# EAGLE board Daughter_Board (EAGLE 8.3.2)
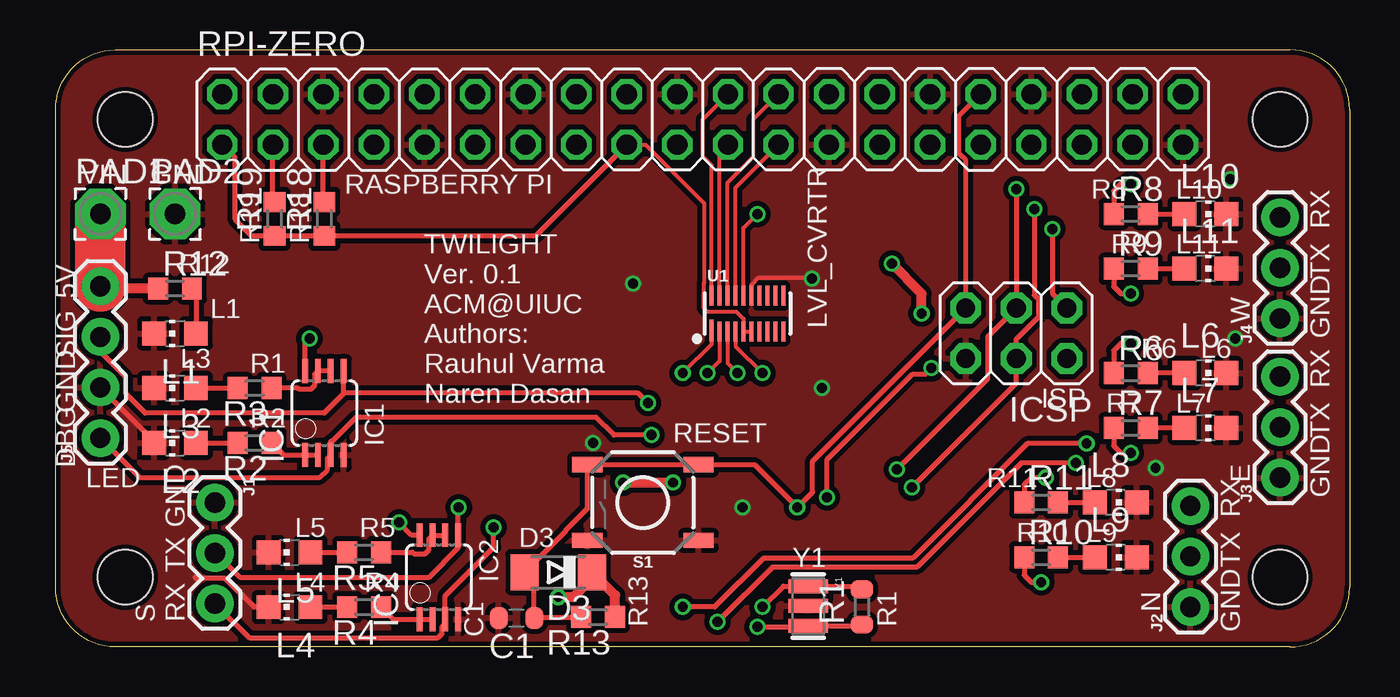
[diagram p0: board, top side]
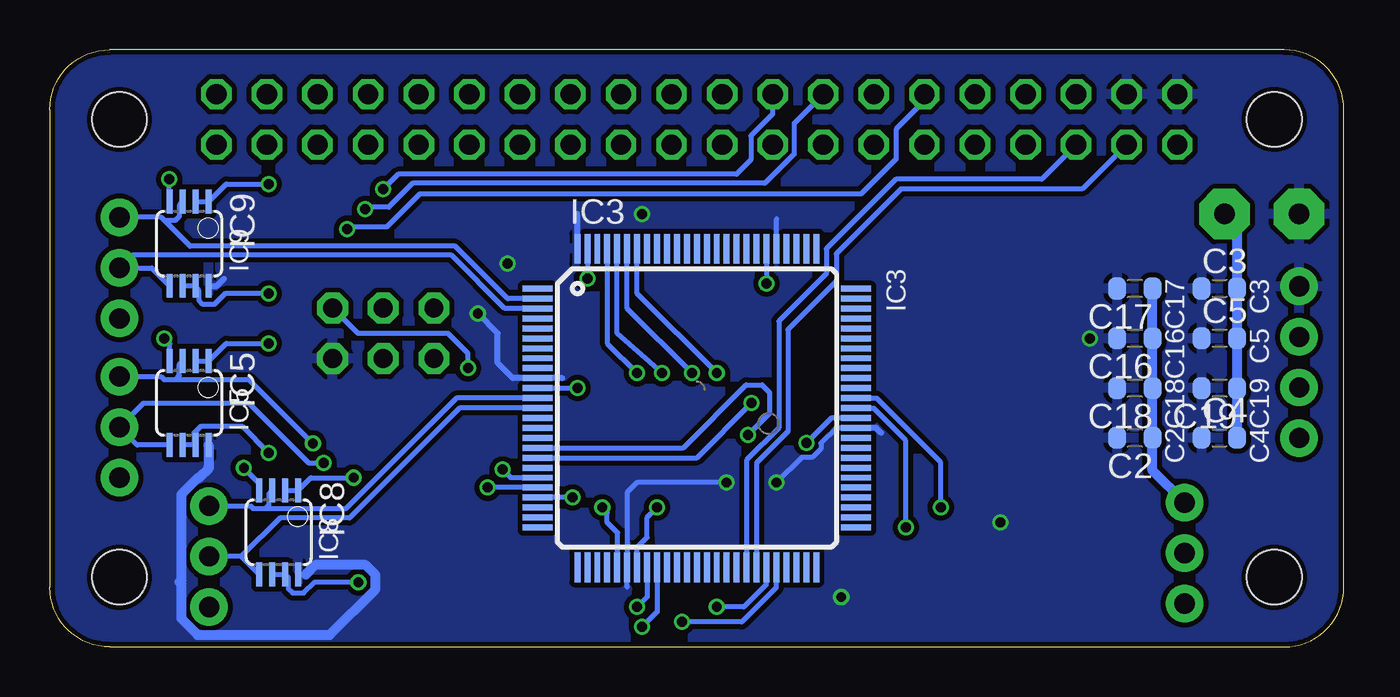
[diagram p1: board, bottom side, seen from below]

Size 65 x 30 mm. Coordinates in mm from the lower left corner, seen from the top.
Outline: 0,3 0,27 arc-90 3,30 62,30 arc-90 65,27 65,3 arc-90 62,0 3,0 arc-90 0,3
Copper layers (1*16): Top 0.035mm / dielectric 1.5mm / Bottom 0.035mm
Design rules "SeeedStudio_2layer_DRU_no_angle_20140221": minimum track width 6mil, minimum drill 12mil, track to track 6mil, track to pad 6mil, pad to pad 6mil, via to via 6mil, smd to smd 0mil, copper to edge 10mil, drill to drill 10mil, minimum pad ring 10mil, minimum via ring 6mil, stop-mask expansion 2mil, vias tented up to drill 100mil, thermal gap 10mil
Net classes: 0 default: width 0.203 mm, drill 0.406 mm, clearance 0.203 mm; 1 power: width 0.61 mm, drill 0.406 mm, clearance 0.203 mm; 2 gnd: width 0.305 mm, drill 0.406 mm, clearance 0.203 mm; 3 power usb: width 0.508 mm, drill 0.406 mm, clearance 0.203 mm
Holes 2.75 mm at 3.5,3.5 3.5,26.5 61.5,26.5 61.5,3.5
tKeepout: area 0.8,23.8 to 6.2,29.2; area 0.8,0.8 to 6.2,6.2; area 58.8,0.8 to 64.2,6.2; area 58.8,23.8 to 64.2,29.2
bKeepout: area 0.8,23.8 to 6.2,29.2; area 0.8,0.8 to 6.2,6.2; area 58.8,0.8 to 64.2,6.2; area 58.8,23.8 to 64.2,29.2

## Footprints (pad centres in the part's own frame; a part is rotated, then mirrored left to right if it is on the bottom)
C0603-ROUND = smd 0.898 x 1.1: 1 -0.889,0; 2 0.889,0
MINIMELF = smd 1.4 x 1.8: A 1.7,0; C -1.7,0
MSOP08 = smd 0.3 x 1.2: 1 -0.976,-2.113; 2 -0.326,-2.113; 3 0.324,-2.113; 4 0.974,-2.113; 5 0.974,2.112; 6 0.324,2.112; 7 -0.326,2.112; 8 -0.976,2.112
TQFP100 = smd 1.5 x 0.3: 1 -8,6; 2 -8,5.5; 3 -8,5; 4 -8,4.5; 5 -8,4; 6 -8,3.5; 7 -8,3; 8 -8,2.5; 9 -8,2; 10 -8,1.5; 11 -8,1; 12 -8,0.5; 13 -8,0; 14 -8,-0.5; 15 -8,-1; 16 -8,-1.5; 17 -8,-2; 18 -8,-2.5; 19 -8,-3; 20 -8,-3.5; 21 -8,-4; 22 -8,-4.5; 23 -8,-5; 24 -8,-5.5; 25 -8,-6; 51 8,-6; 52 8,-5.5; 53 8,-5; 54 8,-4.5; 55 8,-4; 56 8,-3.5; 57 8,-3; 58 8,-2.5; 59 8,-2; 60 8,-1.5; 61 8,-1; 62 8,-0.5; 63 8,0; 64 8,0.5; 65 8,1; 66 8,1.5; 67 8,2; 68 8,2.5; 69 8,3; 70 8,3.5; 71 8,4; 72 8,4.5; 73 8,5; 74 8,5.5; 75 8,6 | smd 0.3 x 1.5: 26 -6,-8; 27 -5.5,-8; 28 -5,-8; 29 -4.5,-8; 30 -4,-8; 31 -3.5,-8; 32 -3,-8; 33 -2.5,-8; 34 -2,-8; 35 -1.5,-8; 36 -1,-8; 37 -0.5,-8; 38 0,-8; 39 0.5,-8; 40 1,-8; 41 1.5,-8; 42 2,-8; 43 2.5,-8; 44 3,-8; 45 3.5,-8; 46 4,-8; 47 4.5,-8; 48 5,-8; 49 5.5,-8; 50 6,-8; 76 6,8; 77 5.5,8; 78 5,8; 79 4.5,8; 80 4,8; 81 3.5,8; 82 3,8; 83 2.5,8; 84 2,8; 85 1.5,8; 86 1,8; 87 0.5,8; 88 0,8; 89 -0.5,8; 90 -1,8; 91 -1.5,8; 92 -2,8; 93 -2.5,8; 94 -3,8; 95 -3.5,8; 96 -4,8; 97 -4.5,8; 98 -5,8; 99 -5.5,8; 100 -6,8
2X03 = drill 0.95 pad 1.55 octagon: 1 -2.54,-1.27; 2 -2.54,1.27; 3 0,-1.27; 4 0,1.27; 5 2.54,-1.27; 6 2.54,1.27
1X03 = drill 1.016 pad 1.88: 1 0,0; 2 2.54,0; 3 5.08,0
1X04 = drill 1.016 pad 1.88: 1 0,0; 2 2.54,0; 3 5.08,0; 4 7.62,0
CHIP-LED0805 = smd 1.2 x 1.2: A 0,-1.05; C 0,1.05
2,54/1,0 = drill 1.016 pad 2.54 octagon: 1 0,0
R0603-ROUND = smd 0.898 x 1.1: 1 -0.889,0; 2 0.889,0
R0603 = smd 1 x 1.1: 1 -0.85,0; 2 0.85,0
2X20 = drill 1.016 octagon: 1 -24.13,-1.27; 2 -24.13,1.27; 3 -21.59,-1.27; 4 -21.59,1.27; 5 -19.05,-1.27; 6 -19.05,1.27; 7 -16.51,-1.27; 8 -16.51,1.27; 9 -13.97,-1.27; 10 -13.97,1.27; 11 -11.43,-1.27; 12 -11.43,1.27; 13 -8.89,-1.27; 14 -8.89,1.27; 15 -6.35,-1.27; 16 -6.35,1.27; 17 -3.81,-1.27; 18 -3.81,1.27; 19 -1.27,-1.27; 20 -1.27,1.27; 21 1.27,-1.27; 22 1.27,1.27; 23 3.81,-1.27; 24 3.81,1.27; 25 6.35,-1.27; 26 6.35,1.27; 27 8.89,-1.27; 28 8.89,1.27; 29 11.43,-1.27; 30 11.43,1.27; 31 13.97,-1.27; 32 13.97,1.27; 33 16.51,-1.27; 34 16.51,1.27; 35 19.05,-1.27; 36 19.05,1.27; 37 21.59,-1.27; 38 21.59,1.27; 39 24.13,-1.27; 40 24.13,1.27
TACTILE_SWITCH_SMD_5.2MM = smd 1.524 x 0.762: 1 -2.794,1.905; 2 2.794,1.905; 3 -2.794,-1.905; 4 2.794,-1.905
UFDFN-20 = smd 0.2 x 1.1: 1 -1.8,-0.85 | smd 0.2 x 1: 2 -1.4,-0.9; 3 -1,-0.9; 4 -0.6,-0.9; 5 -0.2,-0.9; 6 0.2,-0.9; 7 0.6,-0.9; 8 1,-0.9; 9 1.4,-0.9; 10 1.8,-0.9; 11 1.8,0.9; 12 1.4,0.9; 13 1,0.9; 14 0.6,0.9; 15 0.2,0.9; 16 -0.2,0.9; 17 -0.6,0.9; 18 -1,0.9; 19 -1.4,0.9; 20 -1.8,0.9
RESONATOR = smd 0.7 x 2: 1 -1,0; 2 0,0; 3 1,0

## Placement (x,y rotation side)
C1  22p  [C0603-ROUND]  23.15,1.45 180 top
C2  100n  [C0603-ROUND]  10.5,10.5 180 bottom
C3  100n  [C0603-ROUND]  6.25,18 0 bottom
C4  100n  [C0603-ROUND]  6.25,10.5 0 bottom
C5  100n  [C0603-ROUND]  6.25,15.5 0 bottom
C16  100n  [C0603-ROUND]  10.5,15.5 180 bottom
C17  100n  [C0603-ROUND]  10.5,18 180 bottom
C18  100n  [C0603-ROUND]  10.5,13 180 bottom
C19  100n  [C0603-ROUND]  6.25,13 180 bottom
D3  CD1206-S01575  [MINIMELF]  25.25,3.75 180 top
IC1  LMV358MMX  [MSOP08]  13.5,11.75 0 top
IC2  LMV358MMX  [MSOP08]  19.25,3.5 0 top
IC3  ATMEGA2560-16AU  [TQFP100]  32.5,12 0 bottom
IC5  LMV358MMX  [MSOP08]  58,12.25 180 bottom
IC8  LMV358MMX  [MSOP08]  53.5,5.75 180 bottom
IC9  LMV358MMX  [MSOP08]  58,20.25 180 bottom
ICSP  3x2M  [2X03]  48.25,15.75 180 top
J1  [1X03]  8,7.25 270 top
J2  [1X03]  57,2 90 top
J3  [1X03]  61.5,8.5 90 top
J4  [1X03]  61.5,16.5 90 top
J5  [1X04]  2.25,10.49 90 top
L1  GREEN  [CHIP-LED0805]  6,15.75 90 top
L2  YELLOW  [CHIP-LED0805]  6,10.25 90 top
L3  YELLOW  [CHIP-LED0805]  6,13 90 top
L4  YELLOW  [CHIP-LED0805]  11.75,2 90 top
L5  YELLOW  [CHIP-LED0805]  11.75,4.75 90 top
L6  YELLOW  [CHIP-LED0805]  57.75,13.75 270 top
L7  YELLOW  [CHIP-LED0805]  57.75,11 270 top
L8  YELLOW  [CHIP-LED0805]  53.25,7.25 270 top
L9  YELLOW  [CHIP-LED0805]  53.25,4.5 270 top
L10  YELLOW  [CHIP-LED0805]  57.75,21.75 270 top
L11  YELLOW  [CHIP-LED0805]  57.75,19 270 top
PAD1  WIREPAD2,54/1,0  [2,54/1,0]  2.25,21.75 0 top
PAD2  WIREPAD2,54/1,0  [2,54/1,0]  6,21.75 0 top
R1  1M  [R0603-ROUND]  40.5,2 90 top
R2  1k  [R0603]  10,10.25 180 top
R3  1k  [R0603]  10,13 180 top
R4  1k  [R0603]  15.5,2 180 top
R5  1k  [R0603]  15.5,4.75 180 top
R6  1k  [R0603]  54,13.75 0 top
R7  1k  [R0603]  54,11 0 top
R8  1k  [R0603]  54,21.75 0 top
R9  1k  [R0603]  54,19 0 top
R10  1k  [R0603]  49.5,4.5 0 top
R11  1k  [R0603]  49.5,7.25 0 top
R12  1k  [R0603]  6,18 0 top
R13  10k  [R0603]  27.25,1.5 180 top
R18  10k  [R0603]  13.5,21.5 90 top
R19  10k  [R0603]  11,21.5 90 top
RPI-ZERO  [2X20]  32.5,26.5 0 top
S1  MOMENTARY-SWITCH-SPST-SMD-5.2-REDUNDANT  [TACTILE_SWITCH_SMD_5.2MM]  29.5,7.25 180 top
U1  TXB0108DQSR  [UFDFN-20]  34.75,16.75 0 top
Y1  CSTCE16M0V53-R0 16MHZ  [RESONATOR]  37.8,2.05 270 top

## Library data of the parts
C1-C5 C16-C19 IC3 ICSP R1 Y1 = SmartPrj
D3 = diode
IC1 IC2 IC5 IC8 IC9 = linear
J1-J4 = SparkFun-Connectors
J5 = SparkFun-Connectors; PROD_ID: CONN-09696
L1-L11 = led
PAD1 PAD2 = wirepad
R2-R13 R18 R19 = resistor
RPI-ZERO = pinhead
S1 = SparkFun-Switches; PROD_ID: SWCH-08247; SF_SKU: COM-08720
U1 = SparkFun-IC-Comms; PROD_ID: IC-12292

## Nets
3V3_OUT: R18.1 R19.1 RPI-ZERO.1 RPI-ZERO.17 U1.5 U1.6
+5V [power usb]: C2.2 C3.1 C4.1 C5.1 C16.2 C17.2 C18.2 C19.2 D3.C IC1.8 IC2.8 IC3.10 IC3.31 IC3.61 IC3.80 IC3.100 IC5.8 IC8.8 IC9.8 ICSP.2 J5.4 PAD1.1 R12.1 R13.1 RPI-ZERO.2 RPI-ZERO.4 U1.16
ARDU_0: IC3.97 U1.4
ARDU_1: IC3.96 U1.3
ARDU_2: IC3.95 U1.2
ARDU_3: IC3.94 U1.1
GND: C1.2 C2.1 C3.2 C4.2 C5.2 C16.1 C17.1 C18.1 C19.1 IC1.4 IC2.4 IC3.11 IC3.32 IC3.62 IC3.81 IC3.99 IC5.4 IC8.4 IC9.4 ICSP.6 J1.1 J2.1 J3.1 J4.1 J5.2 L1.C L2.C L3.C L4.C L5.C L6.C L7.C L8.C L9.C L10.C L11.C PAD2.1 RPI-ZERO.6 RPI-ZERO.9 RPI-ZERO.14 RPI-ZERO.20 RPI-ZERO.25 RPI-ZERO.30 RPI-ZERO.34 RPI-ZERO.39 S1.1 S1.2 U1.15 Y1.2
GPIO4: RPI-ZERO.7
GPIO5: RPI-ZERO.29
GPIO6: RPI-ZERO.31
GPIO7: RPI-ZERO.26
GPIO8: RPI-ZERO.24 U1.18
GPIO9: RPI-ZERO.21 U1.19
GPIO10: RPI-ZERO.19
GPIO11: RPI-ZERO.23 U1.17
GPIO13: RPI-ZERO.33
GPIO14: RPI-ZERO.8
GPIO15: RPI-ZERO.10
GPIO16: RPI-ZERO.36
GPIO17: RPI-ZERO.11
GPIO19: RPI-ZERO.35
GPIO20: RPI-ZERO.38
GPIO21: RPI-ZERO.40
GPIO22: RPI-ZERO.15
GPIO25: RPI-ZERO.22 U1.20
GPIO26: RPI-ZERO.37
GPIO27: RPI-ZERO.13
ID_SC: RPI-ZERO.28
ID_SD: RPI-ZERO.27
N$1: L3.A R3.2
N$2: L2.A R2.2
N$3: L1.A R12.2
N$4: IC1.1 IC1.2 R2.1
N$5: IC5.6 IC5.7 R7.1
N$6: IC1.6 IC1.7 R3.1
N$7: IC5.1 IC5.2 R6.1
N$8: IC2.6 IC2.7 R5.1
N$9: IC2.1 IC2.2 R4.1
N$10: L4.A R4.2
N$11: L5.A R5.2
N$12: IC8.1 IC8.2 R11.1
N$13: L7.A R7.2
N$14: L6.A R6.2
N$15: IC8.6 IC8.7 R10.1
N$16: IC9.1 IC9.2 R8.1
N$17: IC9.6 IC9.7 R9.1
N$18: L11.A R9.2
N$19: L10.A R8.2
N$21: L8.A R11.2
N$22: L9.A R10.2
PB1: IC3.20 ICSP.3 RPI-ZERO.18
PB2: IC3.21 ICSP.4 RPI-ZERO.16
PB3: IC3.22 ICSP.1 RPI-ZERO.12
PE0: IC3.2 IC9.3 J4.3
PE1: IC3.3 IC9.5 J4.2
PH5: IC1.3 IC3.17 J5.1
PH6: IC1.5 IC3.18 J5.3
RESET: C1.1 D3.A IC3.30 ICSP.5 R13.2 RPI-ZERO.32 S1.3 S1.4
RXD1: IC3.45 IC5.3 J3.3
RXD2: IC3.12 IC8.3 J2.3
RXD3: IC2.3 IC3.63 J1.3
SCL: IC3.43 R18.2 RPI-ZERO.5
SDA: IC3.44 R19.2 RPI-ZERO.3
TXD1: IC3.46 IC5.5 J3.2
TXD2: IC3.13 IC8.5 J2.2
TXD3: IC2.5 IC3.64 J1.2
XTAL1: IC3.34 R1.1 Y1.3
XTAL2: IC3.33 R1.2 Y1.1

## Tracks (layer width: path | path; a pad name or v marks a point on that pad's centre or on a via)
3V3_OUT  (1 unrouted)
  Top 0.203: RPI-ZERO.17 29.63,25.23 32.57,22.3 32.57,18.3 32.55,18.28 32.55,17.02 32.72,16.84 34.19,16.84 34.55,16.48 U1.5 | U1.5 U1.6
  Top 0.254: RPI-ZERO.1 9,24.6 9,21.5 9.85,20.65 R19.1 R18.1 24.11,20.65 RPI-ZERO.17
+5V  (via drill 0.5)
  Top 0.203: U1.16 34.55,21.05 v35.25,21.75
  Top 0.254: IC2.8 17.89,5.61 v17.25,6.25 | IC1.8 12.52,15.23 v12.75,15.5
  Top 0.508: R13.1 28.1,2.6 27.1,3.6 | 27.1,3.6 D3.C | v43.5,16.75 43.5,17.75 v42,19.25 | v28.5,8.25 v31,8.25 | R12.1 2.36,18 J5.4 | v25.25,2.5 25.7,2.5 25.71,2.51 26.01,2.51 27.1,3.6
  Top 2.54: PAD1.1 J5.4
  Bottom 0.254: 38.5,21 IC3.100 | 36,3 IC3.31 36,7.75 35.5,8.25 v31,8.25 | IC3.80 28.5,21.5 | v28.5,8.25 27.23,9.52 26.7,9.52 26.27,9.95 26.27,10.23 25.5,11 IC3.61 | 52.13,3.64 IC8.8
  Bottom 0.305: IC3.61 23.5,11 23.25,10.75 | 39.25,13.5 IC3.10 41.75,13.5 42.5,14.25 42.5,15.75 v43.5,16.75 | IC3.100 38.5,21.75 | IC9.8 56.61,18.14 56.25,18.5
  Bottom 0.508: IC5.8 57.02,9.02 57,9 57.52,8.48 57.58,8.48 58.4,7.66 58.4,3.35 58.5,3.25 58.4,3.15 58.4,1.42 57.58,0.6 50.93,0.6 48.64,2.89 48.64,3.61 49.14,4.11 51.66,4.11 52.13,3.64
  pour Bottom (isolate 0.254): 0,0 65,0 65,30 0,30
ARDU_0  (via drill 0.5)
  Top 0.203: U1.4 34.15,15.1 v35.5,13.75
  Bottom 0.254: IC3.97 37,15.25 v35.5,13.75
ARDU_1  (via drill 0.5)
  Top 0.203: U1.3 33.75,14.25 v34.25,13.75
  Bottom 0.254: v34.25,13.75 36.5,15.75 IC3.96
ARDU_2  (via drill 0.5)
  Top 0.203: U1.2 33.35,14.35 v32.75,13.75
  Bottom 0.254: IC3.95 36,17 v32.75,13.75
ARDU_3  (via drill 0.5)
  Top 0.203: U1.1 32.95,15.2 v31.5,13.75
  Bottom 0.254: v31.5,13.75 35.5,17.75 IC3.94
GND  (via drill 0.5)
  Top 0.152: 34.97,17.67 U1.15
  Top 0.203: U1.15 34.95,18.19 35.31,18.54 37.96,18.54 v38,18.5
  Top 0.254: L4.C 9.97,2 8.53,3.44 7.06,3.44 7,3.5 | J5.2 4.95,10.33 L2.C
  Bottom 0.254: IC3.99 v38,18.5 | IC3.11 v38.5,13 | IC3.81 v29,18.25 | IC9.4 59,22.39 v59,23.5 | IC5.4 58.97,15.22 v59.25,15.5 | IC8.4 54.47,8.22 v55.25,9 | IC3.62 25.75,11.5 v27,10.25 | IC3.32 35.5,5 35,5.5 35,6.5 v34.5,7
  Bottom 0.508: J1.1 9.61,8.86 C2.1 C18.1 C16.1 C17.1 | C4.2 C19.1 C5.2 C3.2 5.36,21.11 PAD2.1
  pour Top (isolate 0.254): 0,0 65,0 65,30 0,30
GPIO8
  Top 0.203: U1.18 33.75,23.34 35.05,24.64 35.05,26.51 RPI-ZERO.24
GPIO9
  Top 0.203: U1.19 33.35,24.81 RPI-ZERO.21
GPIO11
  Top 0.203: U1.17 34.15,23.07 RPI-ZERO.23
GPIO25
  Top 0.203: U1.20 32.95,24.2 32.51,24.64 32.51,26.51 RPI-ZERO.22
N$1
  Top 0.254: L3.A R3.2
N$2
  Top 0.254: L2.A R2.2
N$3
  Top 0.254: R12.2 7.05,17.8 L1.A
N$4
  Top 0.254: IC1.2 IC1.1 11.46,9.64 R2.1
N$5  (via drill 0.5)
  Top 0.254: v54,9.75 53.5,9.75 53.15,10.1 R7.1
  Bottom 0.254: 57.75,10.14 IC5.6 | 57.75,10.14 IC5.7 | v54,9.75 55.32,11.07 57.43,11.07 57.75,10.75 57.75,10.14
N$6
  Top 0.254: IC1.6 IC1.7 13,13.69 13,13.12 12.81,12.93 12.24,12.93 12.17,13 R3.1
N$7  (via drill 0.5)
  Top 0.254: v54,15.25 53.5,15.25 53.15,14.9 R6.1
  Bottom 0.254: IC5.2 IC5.1 56.14,15.25 v54,15.25
N$8
  Top 0.254: IC2.6 IC2.7 18.75,5.44 18.75,4.88 18.56,4.68 17.99,4.68 17.92,4.75 R5.1
N$9
  Top 0.254: IC2.2 IC2.1 16.96,1.39 R4.1
N$10
  Top 0.254: L4.A R4.2
N$11
  Top 0.254: L5.A R5.2
N$12  (via drill 0.5)
  Top 0.254: v49.75,8.5 49,8.5 48.65,8.15 R11.1
  Bottom 0.254: IC8.2 IC8.1 51.89,8.5 v49.75,8.5
N$13
  Top 0.254: L7.A R7.2
N$14
  Top 0.254: L6.A R6.2
N$15  (via drill 0.5)
  Top 0.254: R10.1 48.65,3.6 49,3.25 v49.5,3.25
  Bottom 0.254: IC8.6 IC8.7 53,3.47 53,2.9 52.81,2.71 52.24,2.71 51.7,3.25 v49.5,3.25
N$16  (via drill 0.5)
  Top 0.254: v54,23.25 53.5,23.25 53.15,22.9 R8.1
  Bottom 0.254: IC9.2 IC9.1 56.14,23.25 v54,23.25
N$17  (via drill 0.5)
  Top 0.254: R9.1 53.15,18.1 53.5,17.75 v54,17.75
  Bottom 0.254: 57.75,18.14 IC9.6 | 57.75,18.14 IC9.7 | 57.75,18.14 57.5,17.89 57.5,17.4 57.31,17.21 56.74,17.21 56.2,17.75 v54,17.75
N$18
  Top 0.254: R9.2 L11.A
N$19
  Top 0.254: R8.2 L10.A
N$21
  Top 0.254: R11.2 L8.A
N$22
  Top 0.254: R10.2 L9.A
PB1  (via drill 0.5)
  Top 0.254: v48.25,23 ICSP.3 46.81,15.59 46.81,13.47 v42.25,8.91
  Bottom 0.254: IC3.20 41.84,8.5 v42.25,8.91 | RPI-ZERO.18 28.69,26.77 29.78,25.68 29.78,24.47 30.5,23.75 47.5,23.75 v48.25,23
PB2  (via drill 0.5)
  Top 0.254: v49.16,22 49.16,17.68 49.35,17.48 49.35,16.56 48.25,15.46 ICSP.4 48.25,13.25 v43,8
  Bottom 0.254: IC3.21 v43,8 | v49.16,22 48.81,22.09 47.98,22.09 46.78,23.29 29.08,23.29 27.6,24.78 27.6,26.32 RPI-ZERO.16
PB3  (via drill 0.5)
  Top 0.254: v38.75,7.5 38.75,9.41 43.04,13.71 43.71,13.71 v44,14 | v50.06,21 50.06,17.75 ICSP.1
  Bottom 0.254: v38.75,7.5 IC3.22 | v44,14 44,14.75 45,15.75 49.52,15.75 ICSP.1 | RPI-ZERO.12 21.07,27.43 22.5,26 22.5,24.5 24.25,22.75 46.42,22.75 48.08,21.09 49.97,21.09 v50.06,21
PE0
  Bottom 0.254: IC9.3 58.49,22.19 58.49,21.63 58.69,21.43 59.25,21.43 | 59.25,21.43 59.26,21.43 59.41,21.58 J4.3 | IC3.2 42,17.5 44.37,19.87 | 44.37,19.87 | 44.37,19.87 44.63,20.13 57.95,20.13 59.25,21.43
PE1
  Bottom 0.254: IC9.5 59.88,19.04 J4.2 60.86,19.68 44.82,19.68 42.15,17 IC3.3
PH5  (via drill 0.5)
  Top 0.254: J5.1 4.22,8.52 13.27,8.52 13.65,8.9 13.65,9.47 IC1.3 13.82,10.25 | 13.82,10.25 13.82,10.32 | v29.93,10.64 28.04,10.64 27.15,11.53 15.1,11.53 13.82,10.25
  Bottom 0.254: IC3.17 33.18,10 30.02,13.16 29.23,13.16 28.84,12.77 28.84,11.73 v29.93,10.64
PH6  (via drill 0.5)
  Top 0.254: 14.47,12.75 IC1.5 | 14.47,12.75 14.47,12.72 13.5,11.75 4.5,11.75 3.52,12.73 3.52,13.56 2.25,14.83 J5.3 | v29.75,12.25 29.25,12.75 14.47,12.75
  Bottom 0.254: IC3.18 32.5,9.5 v29.75,12.25
RESET  (via drill 0.5)
  Top 0.254: R13.2 26.35,1.45 C1.1 24.04,3.26 D3.A | D3.A 24.3,4.5 | RPI-ZERO.32 45.38,26.68 45.38,24.78 45.71,24.45 ICSP.5 45.44,16.75 | 45.44,16.75 | 45.44,16.75 38.02,9.33 38.02,7.77 v37.25,7 35.09,9.15 S1.3 S1.4 26.71,6.96 25.61,5.86 25.61,5.81 D3.A
  Bottom 0.254: IC3.30 36.48,4.02 36.48,5.73 37,6.25 37,6.75 v37.25,7
RXD1  (via drill 0.5)
  Top 0.254: v51.78,10.21 48.82,10.21 43.06,4.46 35.56,4.46 33.1,2 v31.5,2
  Bottom 0.254: J3.3 59.41,13.58 59.26,13.43 58.69,13.43 | 58.69,13.43 58.49,13.63 58.49,14.19 IC5.3 | v51.78,10.21 55,13.43 58.69,13.43 | IC3.45 29.02,3.98 29.02,3.11 30.13,2 v31.5,2
RXD2
  Bottom 0.254: 54.19,6.93 54.76,6.93 54.91,7.08 J2.3 | 54.19,6.93 53.99,7.13 53.99,7.69 IC8.3 | 54.19,6.93 50.14,6.93 44.57,12.5 IC3.12
RXD3  (via drill 0.5)
  Top 0.254: J1.3 9.71,0.46 19.21,0.46 19.4,0.65 19.4,1 19.57,1.17 IC2.3 19.57,2.57 22,5 v22,6
  Bottom 0.254: IC3.63 24.48,11.98 23.61,11.98 22,10.37 v22,6
SCL
  Top 0.254: 13.45,22.4 RPI-ZERO.5
  Top 0.406: R18.2 13.45,22.4
  Bottom 0.254: RPI-ZERO.5 15.18,23.5 22.5,23.5 26,20 26,18.75 28.39,16.36 28.39,11.01 30,9.39 IC3.43
SDA
  Top 0.254: 10.91,22.44 RPI-ZERO.3
  Top 0.406: R19.2 10.91,22.44
  Bottom 0.254: RPI-ZERO.3 13.14,23 22.25,23 25.5,19.75 25.5,18.37 27.93,15.94 27.93,10.81 29.5,9.24 IC3.44
TXD1  (via drill 0.5)
  Top 0.254: v51.25,9.25 48.5,9.25 43.25,4 36,4 v33.25,1.25
  Bottom 0.254: v51.25,9.25 52,9.25 55,12.25 60.29,12.25 J3.2 60.6,10.14 IC5.5 | IC3.46 28.52,3.98 28.52,2.97 30.24,1.25 v33.25,1.25
TXD2
  Bottom 0.254: 55.38,4.54 IC8.5 | 55.38,4.54 J2.2 | IC3.13 44.42,12 49.95,6.48 53.44,6.48 55.38,4.54
TXD3  (via drill 0.5)
  Top 0.254: J1.2 8.04,4.71 9.25,3.5 18.75,3.5 20.22,4.97 IC2.5 20.22,6.97 v20.25,7
  Bottom 0.254: IC3.64 24.48,12.48 23.47,12.48 20.25,9.26 v20.25,7
XTAL1  (via drill 0.5)
  Top 0.254: v35.25,1 37.75,1 Y1.3 40.44,1.05 R1.1
  Bottom 0.254: IC3.34 34.5,1.75 v35.25,1
XTAL2  (via drill 0.5)
  Top 0.254: v35.5,2 36.55,3.05 Y1.1 40.34,3.05 R1.2
  Bottom 0.254: IC3.33 35,2.5 v35.5,2

## Text on the board
tPlace: VIN | GND | RASPBERRY PI | R8 | L10 | RX | R12 | R19 | R18 | R9 | L11 | 5V | TX | TWILIGHT / Ver. 0.1 / ACM@UIUC | L1 | LVL_CVRTR | W | GND | SIG | L3 | R1 | R6 | L6 | RX | GND | IC1 | Authors: / Rauhul Varma / Naren Dasan | ISP | R7 | L7 | L2 | R2 | RESET | TX | DBG | LED | R11 | L8 | E | GND | GND | L5 | R5 | RX | D3 | R10 | L9 | TX | Y1 | TX | L4 | R4 | IC2 | N | S | RX | R13 | R1 | GND | C1
bPlace: IC9 | IC3 | C3 | C17 | C5 | C16 | C19 | C18 | IC5 | C4 | C2 | IC8